# Altium PCB Bessel.PcbDoc
Units mm, origin at the board's own origin, x right, y up, seen from the top; angles counter-clockwise.
Board outline 50 x 50 mm, 2 copper layers (Top Layer, Bottom Layer); 33 components, 19 nets, 122 pads, 0 vias.
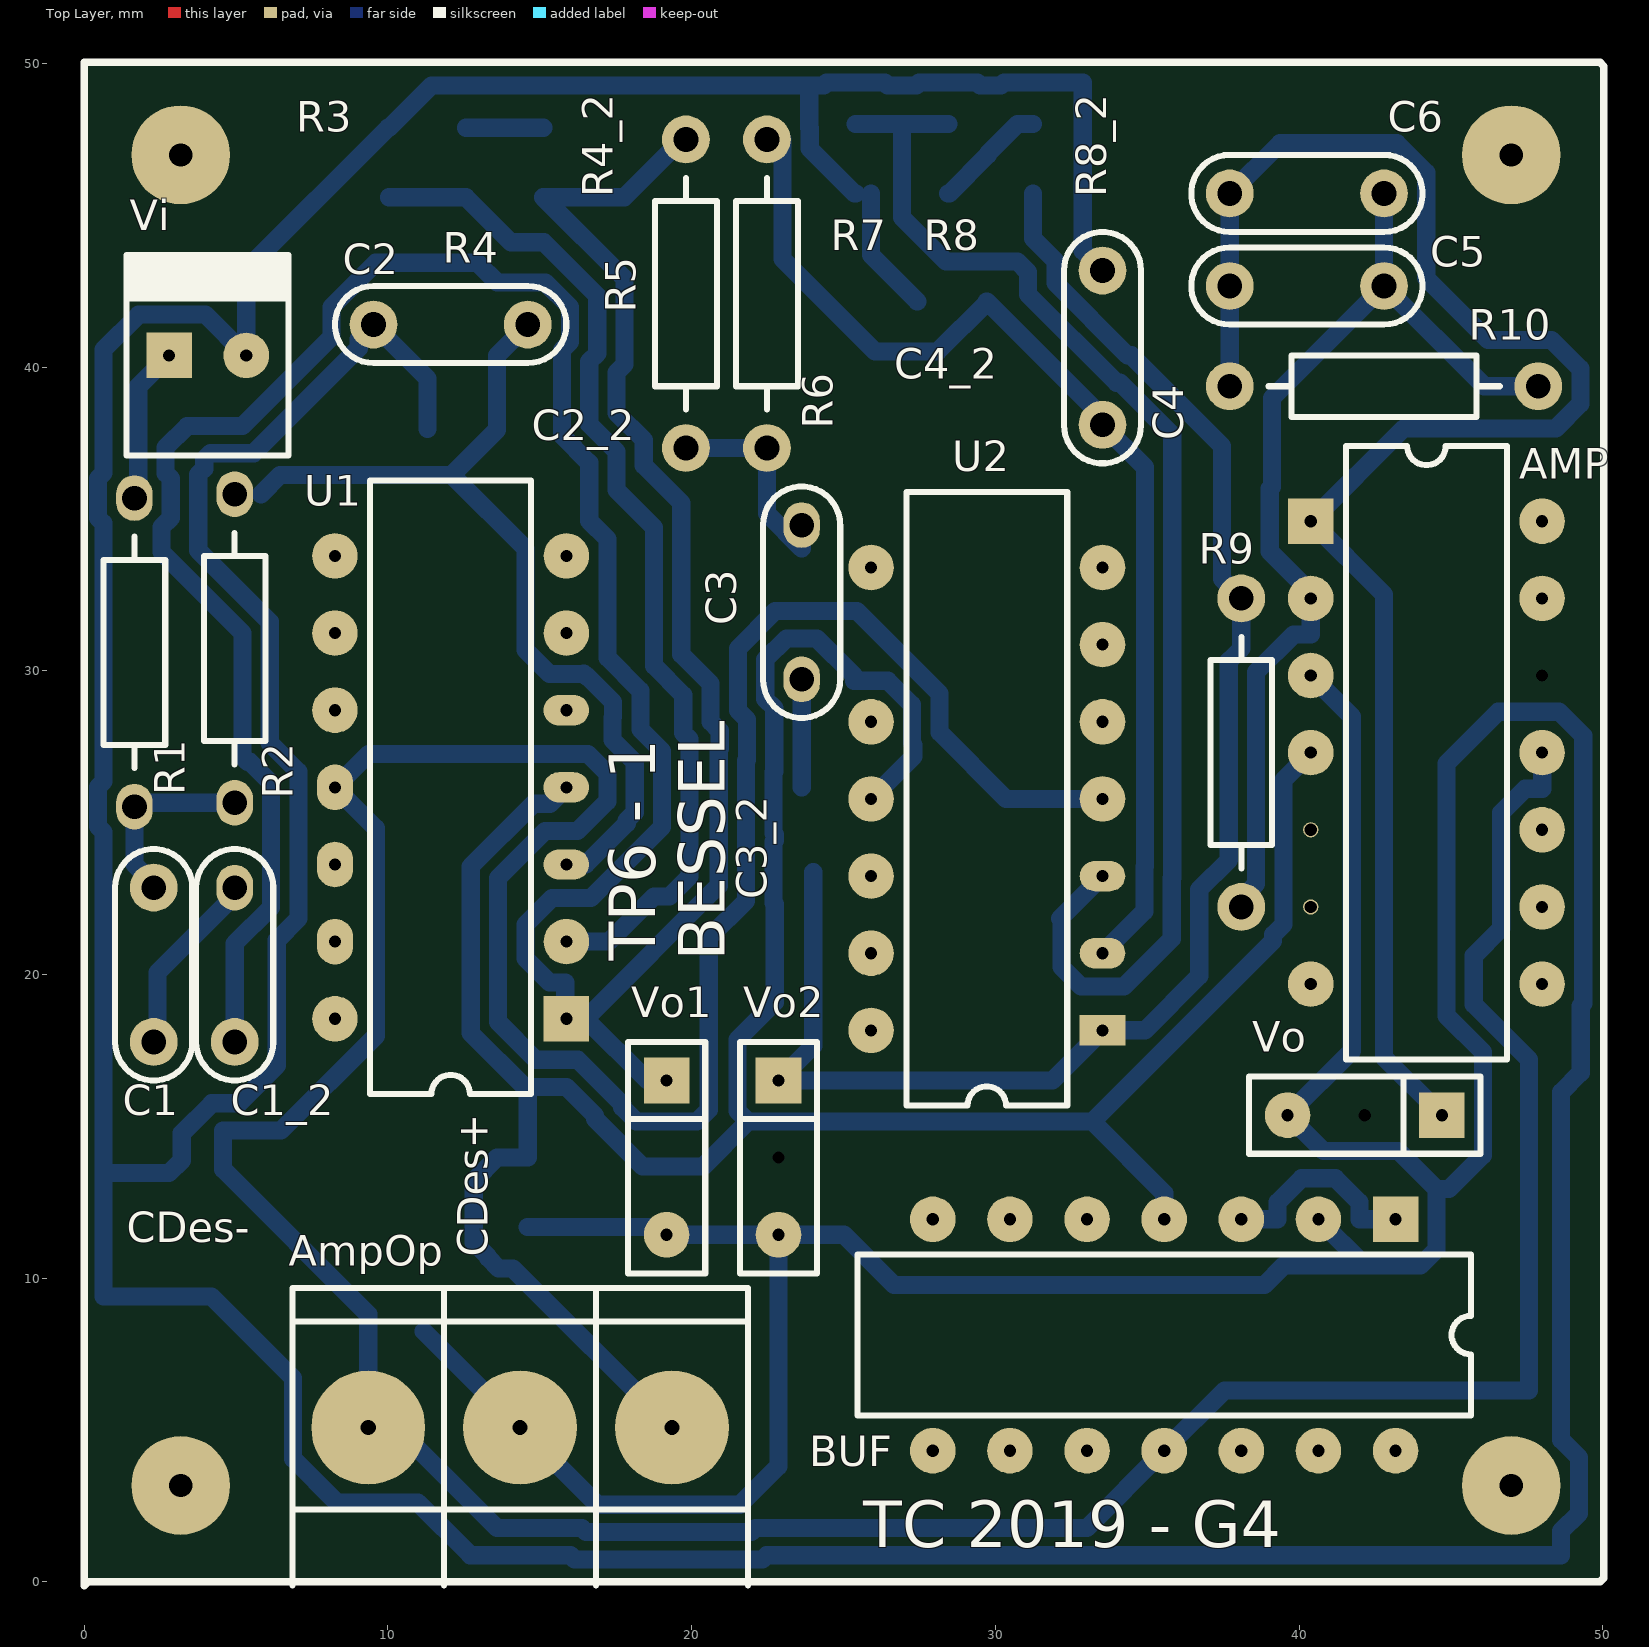
[diagram p0: Top Layer view]
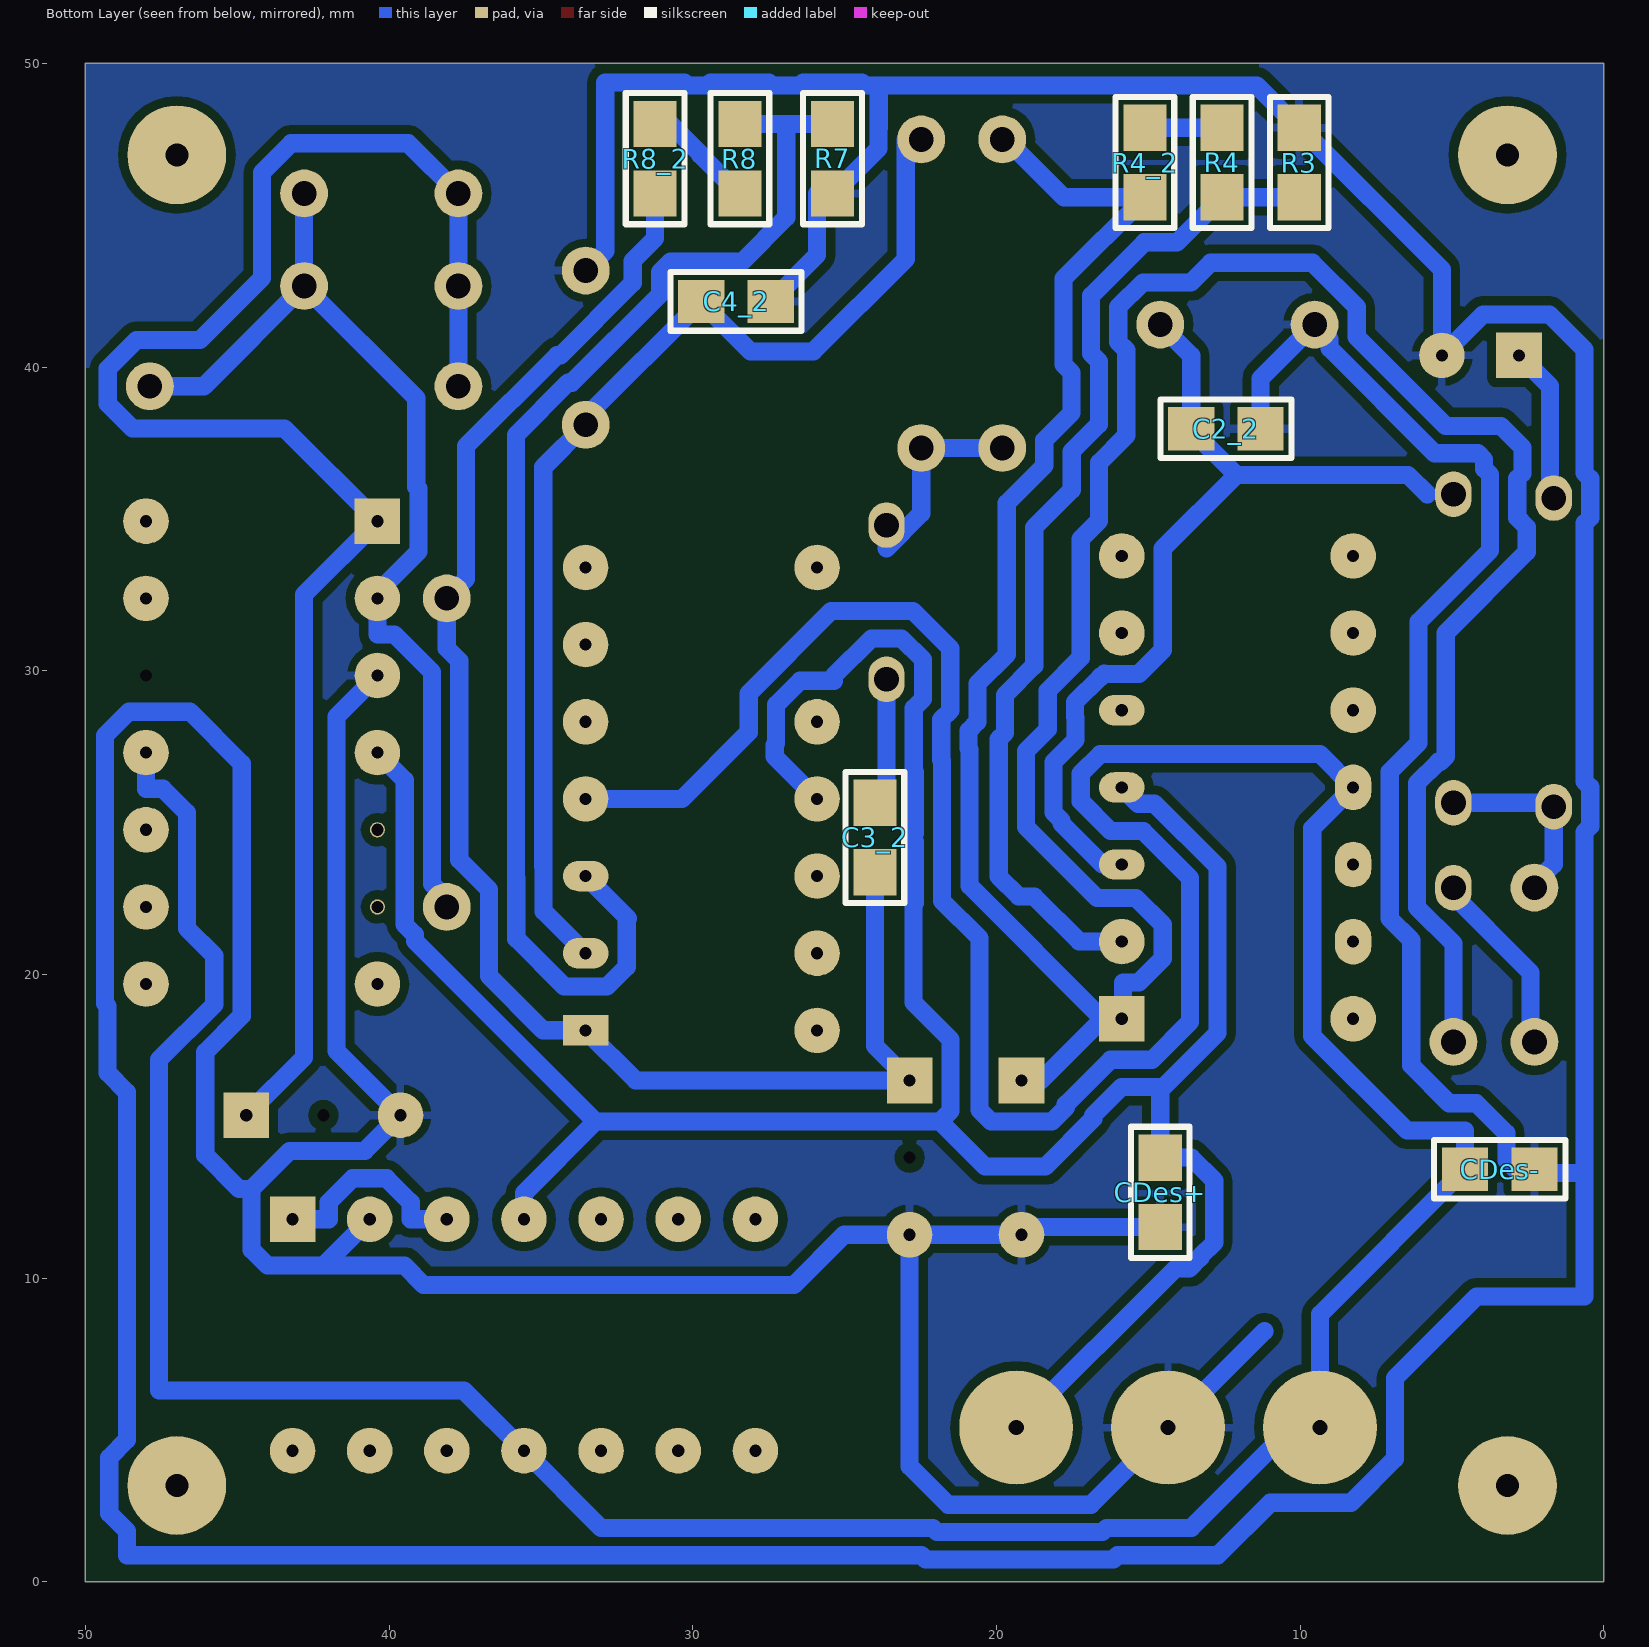
[diagram p1: Bottom Layer view, seen from below]
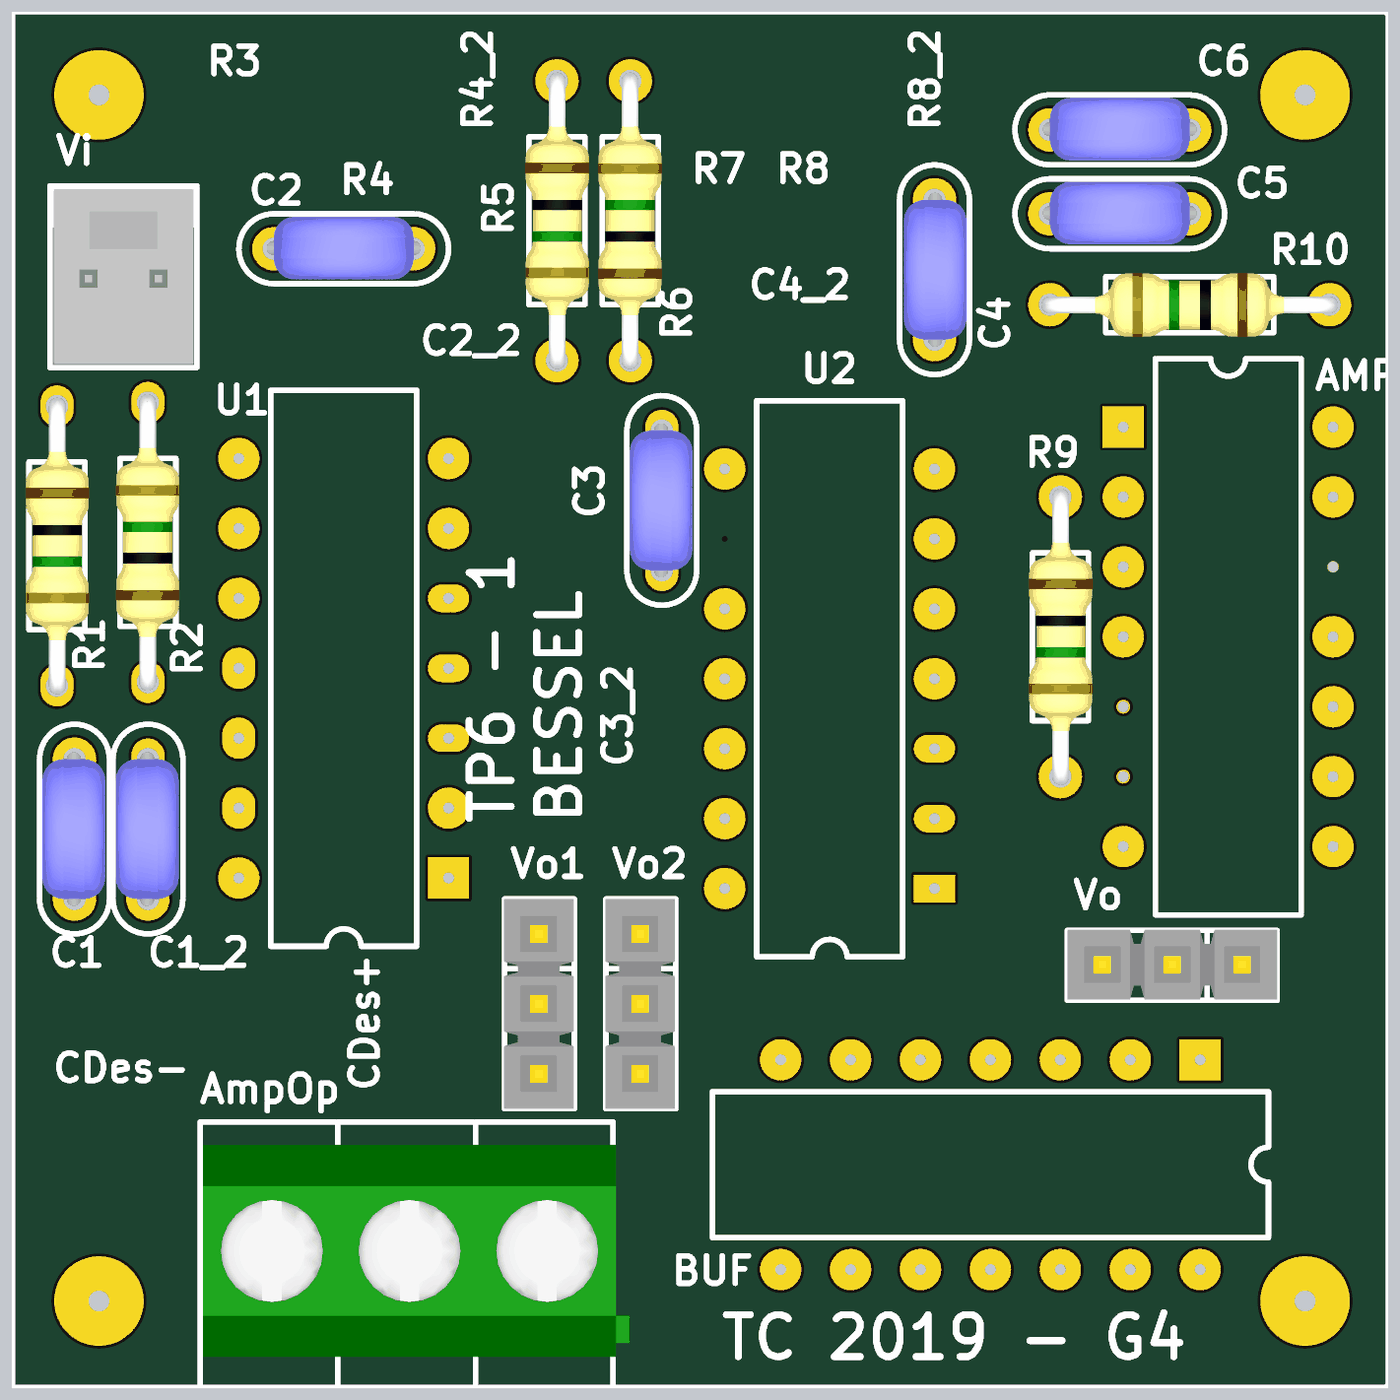
[diagram p2: 3D render of the assembled board from above, using the file's embedded part models]
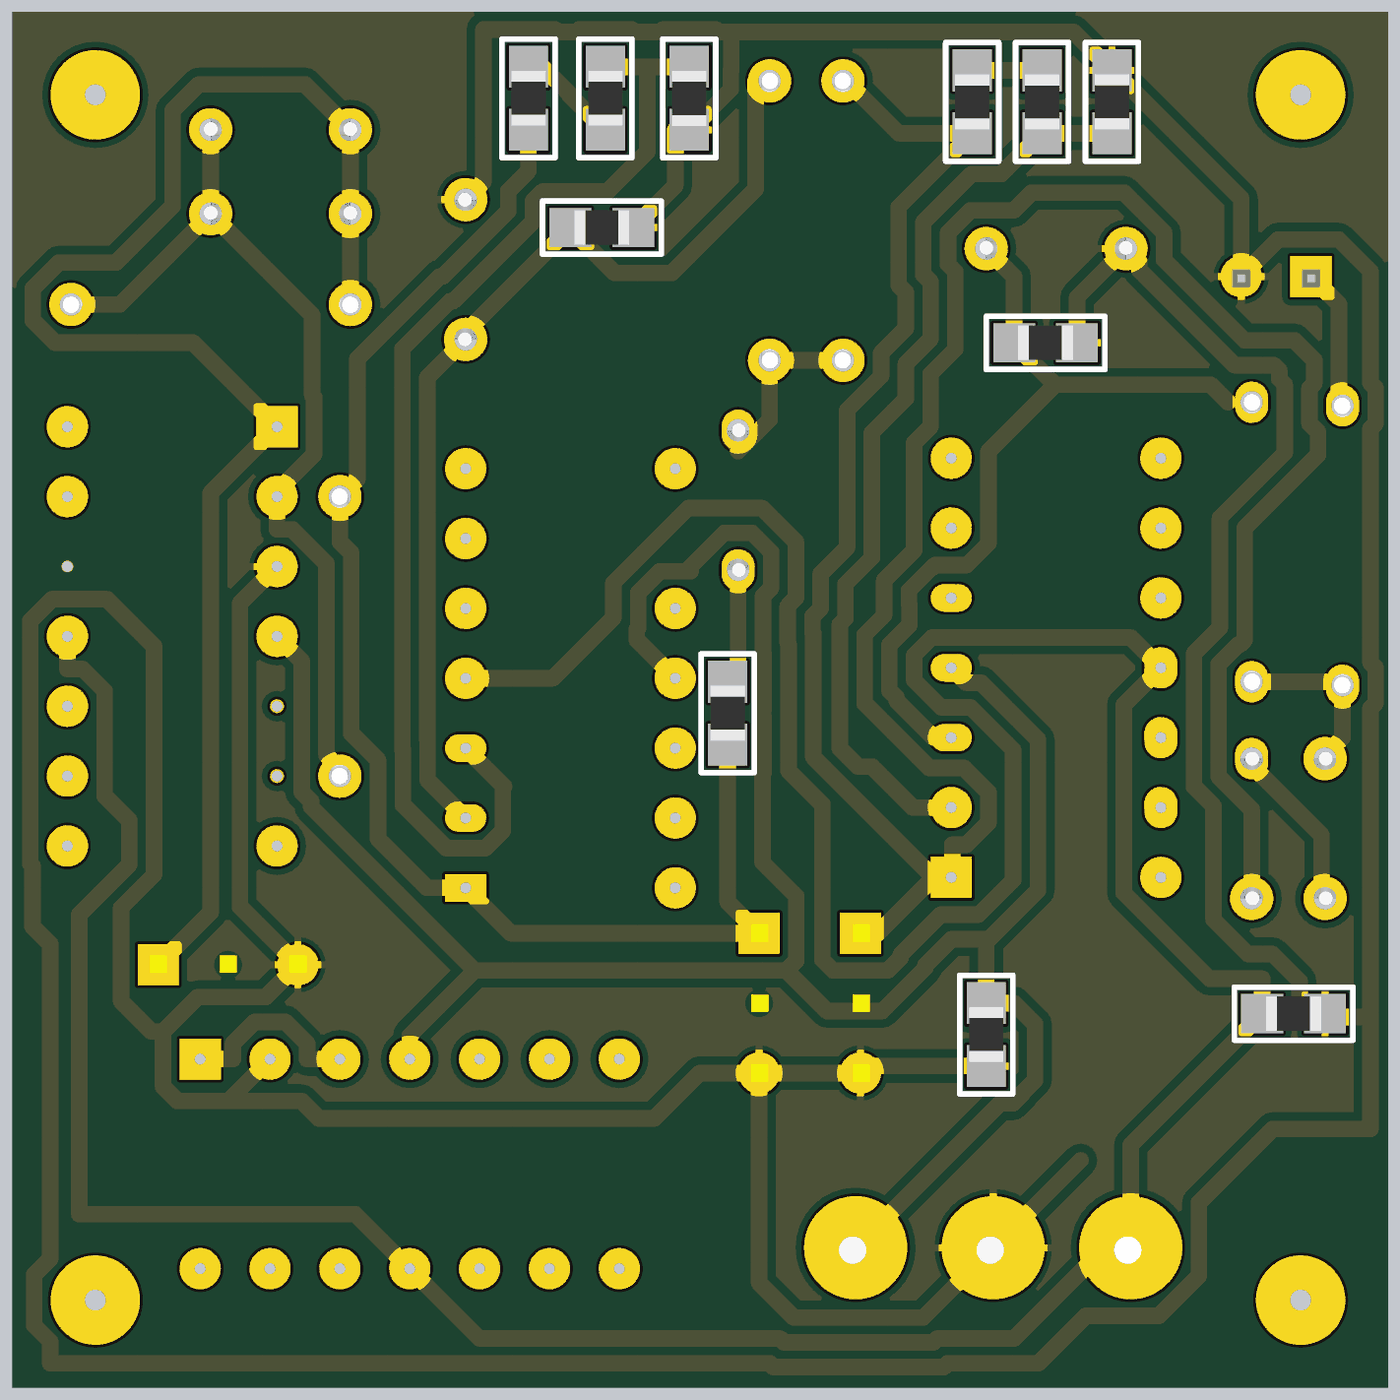
[diagram p3: 3D render of the assembled board from below, using the file's embedded part models]

## Layer stack, top to bottom
Top Solder: solder mask 0.0102, Solder Resist, Dk 3.5
Top Layer: signal copper 0.0356
Dielectric 1: dielectric 0.32, FR-4, Dk 4.8
Bottom Layer: signal copper 0.0356
Bottom Solder: solder mask 0.0102, Solder Resist, Dk 3.5

## Board outline
50,0 50,50 0,50 0,0

## Design rules (kind name [scope] priority, off if disabled: settings)
Clearance [All] p1: gap=0.3 ignorepadtopadclearanceinfootprint=FALSE
PolygonConnect [All] p1: connectstyle=Relief reliefconductorwidth=0.254 reliefentries=4 polygonreliefangle="90 Angle" airgapwidth=0.254
RoutingVias [All] p1: holewidth=0.711 width=1.27 viastyle="Through Hole" minholewidth=0.711 minwidth=1.27 maxholewidth=0.711 maxwidth=1.27
SolderMaskExpansion [All] p1: expansion=0.102
Width [All] p1: maxlimit=0.6 minlimit=0.6 preferedwidth=0.6
30 further rules are at their usual default settings.

## Components (designator, comment, footprint, x,y, rotation, side; value= is the part's Value field where it differs from the comment)
AMP "TL084J" J014#1 44.196,27.305 r270 top (schematic designator U1C)
AmpOp "BORNERA 3" BORNERA3 14.351,5.08 r270 top
BUF "TL084J" J014#2 35.56,8.128 r180 top (schematic designator U1B)
C1 "CAP" CAP200#1 2.286,20.32 r270 top
C1_2 "CAP" CAP200#2 4.953,20.32 r270 top
C2 "CAP" CAP200#1 12.065,41.402 r180 top
C2_2 "CAP" 0805 12.446,37.973 r180 bottom
C3 "CAP" CAP200#3 23.622,32.258 r270 top
C3_2 "CAP" 0805 24.003,24.511 r270 bottom
C4 "CAP" CAP200#1 33.528,40.64 r90 top
C4_2 "CAP" 0805 28.575,42.164 r180 bottom
C5 "CAP" CAP200#1 40.259,42.672 r180 top
C6 "CAP" CAP200#1 40.259,45.72 r180 top
CDes+ "100n" 0805 14.605,12.827 r270 bottom
CDes- "100n" 0805 3.429,13.589 r180 bottom
R1 "RES" RES400#1 1.651,35.687 r270 top
R2 "RES" RES400#1 4.953,25.654 r90 top
R3 "RES" 0805 10.033,46.736 r270 bottom
R4 "RES" 0805 12.573,46.736 r90 bottom
R4_2 "RES" 0805 15.113,46.736 r90 bottom
R5 "RES" RES400#2 19.812,47.498 r270 top
R6 "RES" RES400#2 22.479,37.338 r90 top
R7 "RES" 0805 25.4,46.863 r90 bottom
R8 "RES" 0805 28.448,46.863 r270 bottom
R8_2 "RES" 0805 31.242,46.863 r270 bottom
R9 "RES" RES400#2 38.1,32.385 r270 top
R10 "RES" RES400#2 47.879,39.37 r180 top
U1 "TL084J" J014#3 12.065,26.162 r90 top
U2 "TL084J" J014#4 29.718,25.781 r90 top (schematic designator U?)
Vi "MOLEX2" MOLEX2 2.794,40.386 r0 top
Vo "CON3" SIP3#1 42.164,15.367 r180 top
Vo1 "CON3" SIP3#2 19.177,13.97 r270 top
Vo2 "CON3" SIP3#1 22.86,13.97 r270 top

## Footprints (in the part's own frame and the unit in brackets; to place one, negate y for a bottom-side part, rotate by r counter-clockwise, add the part's x,y. Pads: shape width x height; smd on the part's side, far side on the other; paste and mask are expansions set on the pad)
0805 [mil] "Pasivo 0805"
  rect 60x56 smd: 1(-45,0) 2(45,0)
  silkscreen extent -85,-38 85,38, body extent -39,-25 39,25, height 15
BORNERA3 [mm] "Bornera con Tornillos 5mm separación"
  round 3.75 hole 0.5: 1(0,5) 2(0,0) 3(0,-5)
  silkscreen extent -4.6,-7.5 5.2,7.5, body extent -3.76,-7.39 3.94,8.11, height 10.05
CAP200#1 [mil]
  round 62 hole 32: 1(-100,0) 2(100,0)
  silkscreen extent -150,-50 150,50, body extent -110,-46 110,44, height 246
CAP200#2 [mil]
  oval 59.06x47.24 hole 32: 1(-100,0)
  round 62 hole 32: 2(100,0)
  silkscreen extent -150,-50 150,50, body extent -110,-46 110,44, height 246
CAP200#3 [mil]
  oval 59.06x47.24 hole 32: 1(-100,0) 2(100,0)
  silkscreen extent -150,-50 150,50, body extent -110,-46 110,44, height 246
J014#1 [mm] "DIP; 14 Leads; Row Spacing 7.62 mm; Pitch 2.54 mm"
  rect 1.5x1.5 hole 0.4: 1(-7.62,-3.81)
  round 1.5 hole 0.4: 2(-5.08,-3.81) 3(-2.54,-3.81) 4(0,-3.81) 7(7.62,-3.81) 8(7.62,3.81) 9(5.08,3.81) 10(2.54,3.81) 11(0,3.81) 13(-5.08,3.81) 14(-7.62,3.81)
  round 0.5 hole 0.4: 5(2.54,-3.81) 6(5.08,-3.81)
  round 0.01 hole 0.4: 12(-2.54,3.81)
  silkscreen extent -10.1,-2.65 10.1,2.65
J014#2 [mm] "DIP; 14 Leads; Row Spacing 7.62 mm; Pitch 2.54 mm"
  rect 1.5x1.5 hole 0.4: 1(-7.62,-3.81)
  round 1.5 hole 0.4: 2(-5.08,-3.81) 3(-2.54,-3.81) 4(0,-3.81) 5(2.54,-3.81) 6(5.08,-3.81) 7(7.62,-3.81) 8(7.62,3.81) 9(5.08,3.81) 10(2.54,3.81) 11(0,3.81) 12(-2.54,3.81) 13(-5.08,3.81) 14(-7.62,3.81)
  silkscreen extent -10.1,-2.65 10.1,2.65
J014#3 [mm] "DIP; 14 Leads; Row Spacing 7.62 mm; Pitch 2.54 mm"
  rect 1.5x1.5 hole 0.4: 1(-7.62,-3.81)
  round 1.5 hole 0.4: 2(-5.08,-3.81) 6(5.08,-3.81) 7(7.62,-3.81) 8(7.62,3.81) 9(5.08,3.81) 10(2.54,3.81) 14(-7.62,3.81)
  oval 1x1.5 hole 0.4: 3(-2.54,-3.81) 4(0,-3.81) 5(2.54,-3.81)
  oval 1.5x1.2 hole 0.4: 11(0,3.81) 12(-2.54,3.81) 13(-5.08,3.81)
  silkscreen extent -10.1,-2.65 10.1,2.65
J014#4 [mm] "DIP; 14 Leads; Row Spacing 7.62 mm; Pitch 2.54 mm"
  rect 1x1.5 hole 0.4: 1(-7.62,-3.81)
  oval 1x1.5 hole 0.4: 2(-5.08,-3.81) 3(-2.54,-3.81)
  round 1.5 hole 0.4: 4(0,-3.81) 5(2.54,-3.81) 6(5.08,-3.81) 7(7.62,-3.81) 8(7.62,3.81) 10(2.54,3.81) 11(0,3.81) 12(-2.54,3.81) 13(-5.08,3.81) 14(-7.62,3.81)
  round 0.01 smd: 9(5.08,3.81)
  silkscreen extent -10.1,-2.65 10.1,2.65
MOLEX2 [mm]
  rect 1.5x1.5 hole 0.4: 1(0,0)
  round 1.5 hole 0.4: 2(2.54,0)
  silkscreen extent -1.4,-3.3 3.94,3.3, body extent -1.27,-3.17 3.81,3.17, height 10.74
RES400#1 [mm]
  oval 1.5x1.2 hole 0.813: 1(0,0) 2(10.16,0)
  silkscreen extent 1.27,-1.02 8.89,1.02, body extent -0.3,-1.14 10.46,1.17, height 2.43
RES400#2 [mm]
  round 1.575 hole 0.813: 1(0,0) 2(10.16,0)
  silkscreen extent 1.27,-1.02 8.89,1.02, body extent -0.3,-1.14 10.46,1.17, height 2.43
SIP3#1 [mm]
  rect 1.5x1.5 hole 0.4: 1(-2.54,0)
  round 0.01 hole 0.4: 2(0,0)
  round 1.5 hole 0.4: 3(2.54,0)
  silkscreen extent -3.81,-1.27 3.81,1.27, body extent -3.81,-1.3 3.81,1.24, height 8.38
SIP3#2 [mm]
  rect 1.5x1.5 hole 0.4: 1(-2.54,0)
  round 0.01 smd: 2(0,0)
  round 1.5 hole 0.4: 3(2.54,0)
  silkscreen extent -3.81,-1.27 3.81,1.27, body extent -3.81,-1.3 3.81,1.24, height 8.38

## Part data
AMP BUF U1 U2: "JFET-Input Operational Amplifier", ComponentLink1Description="Manufacturer Link", ComponentLink1URL=http://www.ti.com/, ComponentLink2Description=Datasheet, ComponentLink2URL=http://www-s.ti.com/sc/ds/tl084.pdf, DatasheetVersion=Feb-1999, LatestRevisionDate=04-Mar-2005, LatestRevisionNote="Stylized 3D Model Added.", PackageDescription="DIP; 14 Leads; Row Spacing 7.62 mm; Pitch 2.54 mm", PackageReference=J014, PackageVersion=Jun-1999, Published=16-Jan-2001, Publisher="Altium Limited"
CDes+ CDes-: library part CAP

## Free pads (board coordinates)
  round 3.25 hole 0.762: 1(3.175,3.175) 1(3.175,46.99) 1(46.99,3.175) 1(46.99,46.99)

## Nets (pads, with @x,y where several pads share a name; then routed paths per layer and width w, separated by ;. In a path a pad name is that pad's centre, name@x,y a point inside that pad or via, vN(x,y) a via of type N, cw(c..) or ccw(c..) an arc to the next point about the centre after c; other vN are vias at no path point)
GND: AMP.3 AmpOp.2 BUF.2 C2.2 C2_2.2 C4.2 C4_2.2 CDes+.2 CDes-.2 R3.1 R7.1 Vi.2 Vo1.3 Vo2.3 Vo.3 | length 307.2
  Bottom Layer w0.6: 11.176,8.255 AmpOp.2 16.891,2.54 21.59,2.54 22.86,3.81 Vo2.3 ; C2_2.2 11.303,39.624 C2.2 9.038,40.915 9.038,40.622 5.579,37.164 4.153,37.164 3.948,36.959 3.948,36.656 3.753,36.461 3.753,33.969 6.107,31.615 6.107,27.62 7.053,26.674 7.053,21.84 6.34,21.128 6.34,17.008 5.091,15.759 4.199,15.759 3.21,14.77 3.21,13.878 2.794,13.462 0.635,13.462 ; CDes+.2 18.923,11.684 Vo1.3 ; Vo1.3@19.558,11.43 Vo2.3 ; R7.1 25.364,45.72 23.887,47.197 23.887,47.871 23.876,47.882 23.876,49.276 ; R7.1@25.908,45.72 25.908,43.688 C4_2.2 ; C4.2 32.88,43.828 32.88,49.368 30.282,49.368 30.19,49.276 29.5,49.276 29.408,49.368 27.488,49.368 27.396,49.276 26.452,49.276 26.36,49.368 24.44,49.368 24.348,49.276 23.876,49.276 ; AMP.3 41.736,28.495 41.736,17.479 Vo.3 40.803,14.188 43.279,14.188 44.53,12.937 ; BUF.2 42.164,10.414 ; 0.635,13.462 0.635,24.696 0.451,24.88 0.451,26.174 0.635,26.358 0.635,34.856 0.451,35.04 0.451,36.334 0.635,36.518 0.635,40.576 1.795,41.736 3.984,41.736 Vi.2 5.334,43.216 9.997,47.879 R3.1 11.43,49.276 23.876,49.276 ; 0.635,13.462 0.635,9.398 4.191,9.398 6.876,6.713 6.876,4.055 8.326,2.605 10.984,2.605 12.711,0.878 16.007,0.878 16.145,0.74 22.336,0.74 22.474,0.878 48.63,0.878 48.63,1.668 49.215,2.253 49.215,4.097 48.63,4.682 48.63,16.121 49.276,16.767 49.276,18.966 49.356,19.046 49.356,27.864 48.565,28.655 46.562,28.655 44.856,26.949 44.856,18.641 46.054,17.443 46.054,14.05 44.941,12.937 44.53,12.937 ; Vo2.3 25.019,11.43 26.67,9.779 38.862,9.779 39.497,10.414 42.164,10.414 ; 42.164,10.414 44.005,10.414 44.53,10.939 44.53,12.937
NetC1_1: C1.1 R1.2 R2.1 | length 6.5
  Bottom Layer w0.6: C1.1@2.413,22.86 1.651,23.622 R1.2 1.651,25.654 R2.1 R2.1@5.08,25.654
NetC1_2: C1.2 C1_2.1 | length 6.2
  Bottom Layer w0.6: C1.2@2.413,17.78 2.413,20.066 C1_2.1@5.207,22.86
NetC2_1: C2.1 C2_2.1 R2.2 U1.3 | length 29.2
  Bottom Layer w0.6: 5.815,35.814 6.45,36.449 12.101,36.449 ; C2.1 13.589,40.386 C2_2.1 13.589,37.937 12.101,36.449 ; U1.3@16.51,23.622 17.86,24.972 17.86,25.069 18.125,25.334 18.125,26.99 17.396,27.719 17.396,28.465 17.414,28.483 17.414,28.969 16.581,29.802 16.553,29.802 16.449,29.906 16.434,29.892 15.316,29.892 14.525,30.683 14.525,34.025 12.101,36.449
NetC3_1: C3.1 R5.2 R6.1 | length 6.2
  Bottom Layer w0.6: R5.2@20.066,37.338 R6.1 22.479,35.179 23.622,34.036
NetC3_2: C3.2 C3_2.1 | length 3.6
  Bottom Layer w0.6: C3_2.1@23.622,26.162 C3.2
NetC4_1: C4.1 C4_2.1 R6.2 U2.2 | length 36.8
  Bottom Layer w0.6: R6.2@22.987,47.498 22.987,43.561 26.035,40.513 28.103,40.513 29.718,42.128 C4_2.1 33.528,38.354 C4.1 34.925,36.703 34.925,23.558 34.913,23.545 34.913,22.086 U2.2
NetC5_1: AMP.2 C5.1 C6.1 R9.2 R10.1 | length 33.3
  Bottom Layer w0.6: R9.2 38.1,22.5 38.587,22.987 38.587,29.956 39.827,31.195 40.386,31.195 AMP.2 40.386,32.576 39.036,33.926 39.036,35.994 39.106,36.064 39.106,38.979 C5.1 ; C6.1 C5.1 ; R10.1 46.101,39.37 C5.1
NetR3_2: R3.2 R4.1 U1.2 | length 33.1
  Bottom Layer w0.6: R3.2 R4.1 14.056,44.11 15.132,44.11 16.892,42.349 16.892,40.455 16.627,40.19 16.627,38.119 17.525,37.222 17.525,35.949 18.76,34.714 18.76,30.168 19.722,29.206 19.722,27.953 19.928,27.747 19.928,23.233 19.265,22.57 18.76,22.57 17.272,21.082 U1.2@16.51,21.082
NetR4_2: R4.2 R4_2.2 | length 2.5
  Bottom Layer w0.6: R4.2 R4_2.2
NetR7_2: R7.2 R8.1 U2.3 | length 43.2
  Bottom Layer w0.6: R7.2 26.924,48.006 ; R8.1 26.924,48.006 ; U2.3 32.131,21.844 32.178,21.797 32.178,20.245 32.822,19.601 34.234,19.601 35.813,21.18 35.813,23.172 35.825,23.185 35.825,37.765 34.103,39.487 33.986,39.487 31.08,42.393 31.08,43.124 30.729,43.475 28.371,43.475 26.924,44.922 26.924,48.006
NetR8_2: R8.2 R8_2.1 | length 3.8
  Bottom Layer w0.6: R8.2 28.484,45.72 29.759,46.995 29.759,47.031 30.734,48.006 R8_2.1
NetU1B_1: BUF.1 BUF.3 U1.6 U1.7 | length 6.9
  Bottom Layer w0.6: BUF.3 39.29,11.938 39.29,12.497 40.081,13.288 41.199,13.288 41.99,12.497 41.99,11.938 BUF.1
V+: AMP.4 AmpOp.1 BUF.4 CDes+.1 U1.4 U2.11 | length 93.4
  Bottom Layer w0.6: U1.4 15.335,25.622 14.797,25.622 12.725,23.55 12.725,18.071 14.504,16.292 ; AmpOp.1 14.109,10.322 13.645,10.322 13.294,10.673 13.294,10.709 12.827,11.176 12.827,13.208 13.589,13.97 CDes+.1 14.605,16.191 14.504,16.292 ; U2.11 27.305,27.178 27.305,27.559 27.258,27.606 27.258,28.88 26.467,29.671 25.349,29.671 25.349,29.838 24.119,31.068 23.125,31.068 22.422,30.365 22.422,29.071 22.722,28.771 22.722,26.695 22.692,26.665 22.692,24.643 22.733,24.602 22.733,24.42 22.692,24.379 22.692,22.357 22.733,22.316 22.733,19.083 21.51,17.86 21.51,15.511 21.861,15.16 ; BUF.4 35.56,12.797 33.197,15.16 ; AMP.4 39.487,26.406 39.487,21.65 39.145,21.307 39.145,21.108 33.197,15.16 ; 14.504,16.292 15.878,16.292 16.816,15.353 16.816,15.249 18.386,13.68 20.381,13.68 21.861,15.16 ; 21.861,15.16 33.197,15.16
V-: AMP.11 AmpOp.3 BUF.11 CDes-.1 U1.11 U2.4 | length 151.6
  Bottom Layer w0.6: U2.4 30.357,25.781 28.158,27.98 28.158,29.253 25.443,31.968 22.752,31.968 21.522,30.738 21.522,28.698 21.822,28.398 21.822,27.068 21.792,27.037 21.792,22.427 20.56,21.195 20.56,15.544 20.176,15.16 18.178,15.16 17.716,15.622 17.716,15.726 16.25,17.192 14.876,17.192 13.625,18.443 13.625,23.178 15.169,24.722 16.241,24.722 17.225,25.706 17.225,26.618 16.581,27.262 9.355,27.262 U1.11 9.605,24.812 9.605,17.983 6.481,14.859 4.572,14.859 CDes-.1 9.351,8.81 AmpOp.3 10.287,5.08 13.589,1.778 16.38,1.778 16.518,1.64 21.963,1.64 22.101,1.778 33.02,1.778 BUF.11 37.542,6.3 47.575,6.3 47.575,17.195 45.756,19.014 45.756,20.617 46.656,21.517 46.656,25.324 47.447,26.115 48.006,26.115 AMP.11
Vin: R1.1 Vi.1 | length 4.6
  Bottom Layer w0.6: R1.1@1.778,36.222 1.778,39.37 Vi.1
Vo: AMP.1 C5.2 C6.2 R10.2 Vo.1 | length 56.7
  Bottom Layer w0.6: R10.2 C5.2 C6.2 39.37,47.371 43.227,47.371 44.186,46.412 44.186,42.936 46.228,40.894 48.317,40.894 49.266,39.945 49.266,38.795 48.454,37.983 43.444,37.983 AMP.1 42.799,32.512 42.799,17.272 Vo.1
Vo1: C1_2.2 R4_2.1 R5.1 U1.1 Vo1.1 | length 107.4
  Bottom Layer w0.6: C1_2.2 4.953,21.013 6.153,22.213 6.153,26.301 5.45,27.004 5.381,27.004 5.207,27.178 5.207,31.242 2.54,33.909 2.54,34.729 2.851,35.04 2.851,36.334 2.678,36.507 2.678,37.349 3.393,38.064 5.206,38.064 8.138,40.995 8.138,41.977 9.595,43.434 12.954,43.434 13.599,42.789 15.18,42.789 15.992,41.977 15.992,40.827 15.727,40.562 15.727,37.747 16.625,36.849 16.625,34.942 17.225,34.341 17.225,30.43 18.314,29.341 18.314,28.074 19.025,27.363 19.025,24.864 16.683,22.522 15.406,22.522 14.525,21.641 14.525,20.523 15.316,19.732 15.838,19.732 15.838,18.579 U1.1 ; R5.1@19.304,47.117 17.78,45.593 R4_2.1 17.792,42.914 17.792,40.082 17.527,39.817 17.527,38.492 18.425,37.595 18.425,36.763 19.66,35.528 19.66,30.541 20.622,29.579 20.622,28.325 20.922,28.025 20.922,27.44 20.892,27.41 20.892,22.924 16.51,18.542 18.542,16.51 Vo1.1 Vo1.1@19.558,16.51
Vo2: C3_2.2 R8_2.2 R9.1 U2.1 Vo2.1 | length 51.9
  Bottom Layer w0.6: C3_2.2 24.003,17.653 Vo2.1 31.877,16.51 U2.1 34.925,18.161 36.713,19.949 36.713,22.8 37.687,23.774 37.687,30.328 38.1,30.741 R9.1 37.465,33.02 37.465,37.398 34.475,40.387 34.359,40.387 31.98,42.766 31.98,43.497 31.242,44.235 R8_2.2
pads on no net: AMP.5 AMP.6 AMP.7 AMP.8 AMP.9 AMP.10 AMP.12 AMP.13 AMP.14 BUF.5 BUF.6 BUF.7 BUF.8 BUF.9 BUF.10 BUF.12 BUF.13 BUF.14 U1.5 U1.8 U1.9 U1.10 U1.12 U1.13 U1.14 U2.5 U2.6 U2.7 U2.8 U2.9 U2.10 U2.12 U2.13 U2.14 Vo1.2 Vo2.2 Vo.2

## Polygon pours and split planes (outlines as drawn)
GND on Bottom Layer "Bottom Layer-No Net" (solid, remove dead copper, pour order 2): 0,0 0,50 50,50 50,0

## Silkscreen, mask and mechanical layers (free items; w line width, h text height)
Top Overlay:
  lines w0.254: 0,-0.127 0.127,0 49.911,0 50.038,0.127 50.038,49.911 49.911,50.038 0,50.038 0,-0.127
  text "TP6 - 1 / BESSEL" at 21.082,20.447 h1.52 r90
  text "TC 2019 - G4" at 25.654,1.143 h1.52